# Altium PCB PCB_board.PcbDoc
Units mm, origin at the board's own origin, x right, y up, seen from the top; angles counter-clockwise.
Board outline 62 x 54.25 mm, 2 copper layers (Top Layer, Bottom Layer); 68 components, 71 nets, 381 pads, 0 vias.
Unrouted connection lines stored in the file: 184.
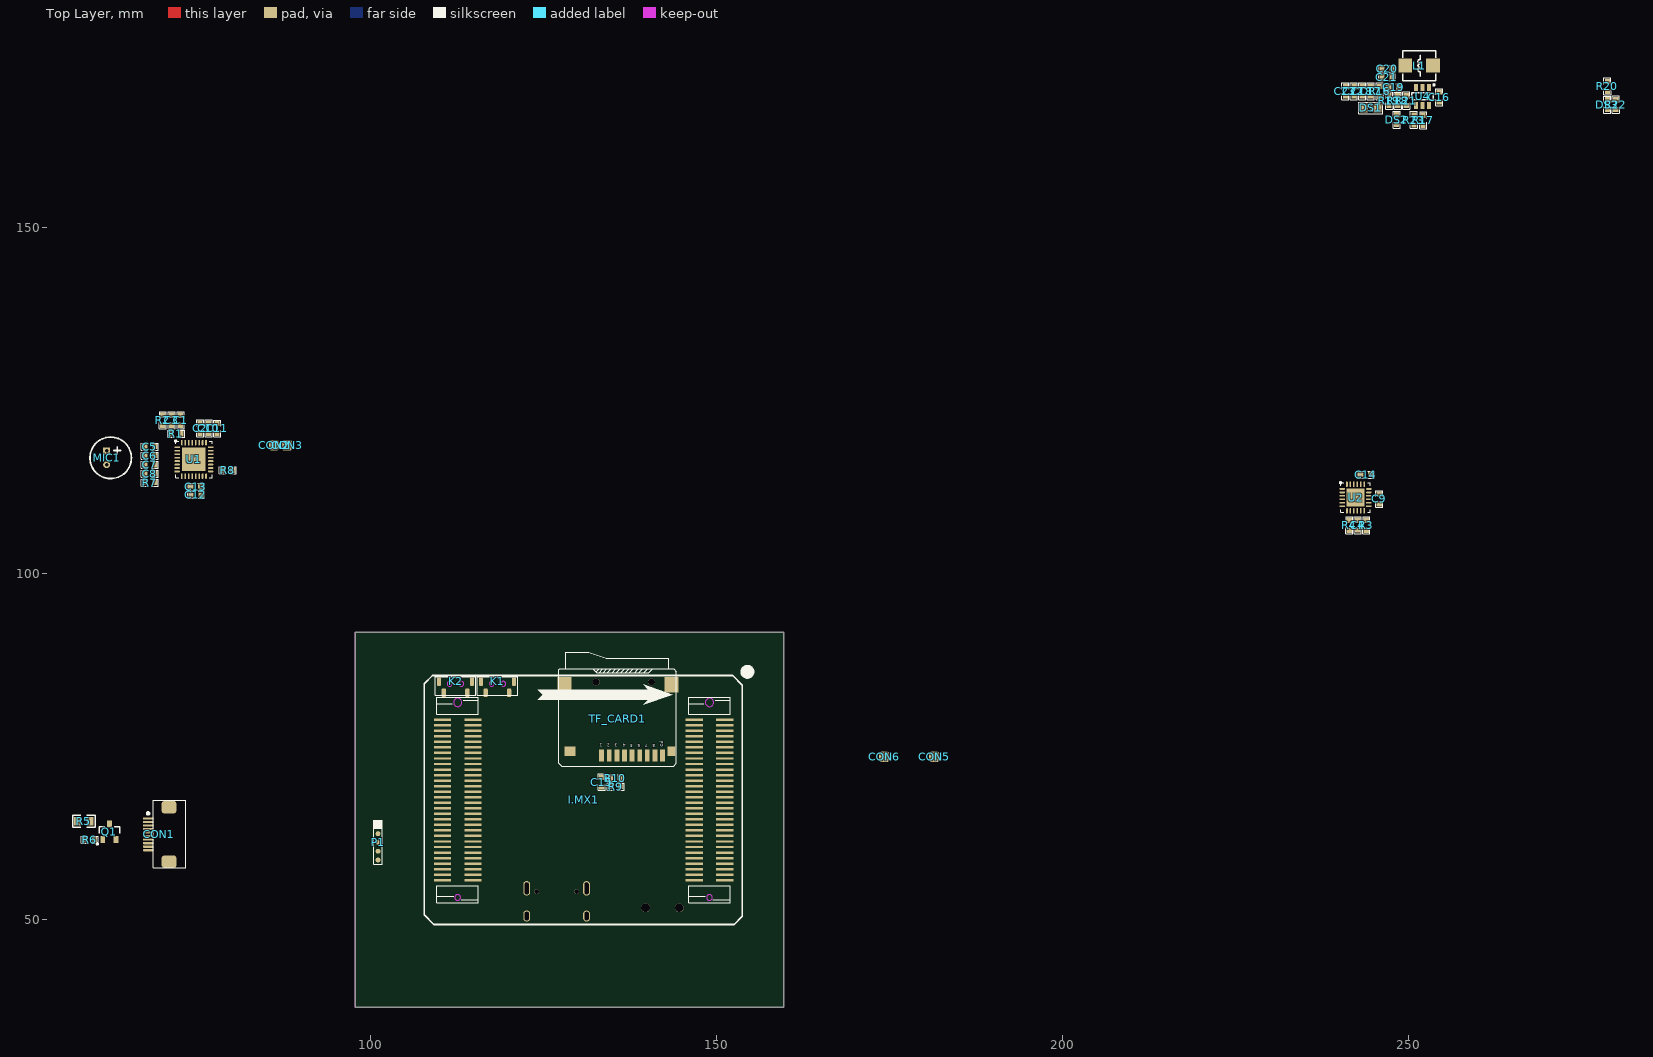
[diagram p0: Top Layer view]
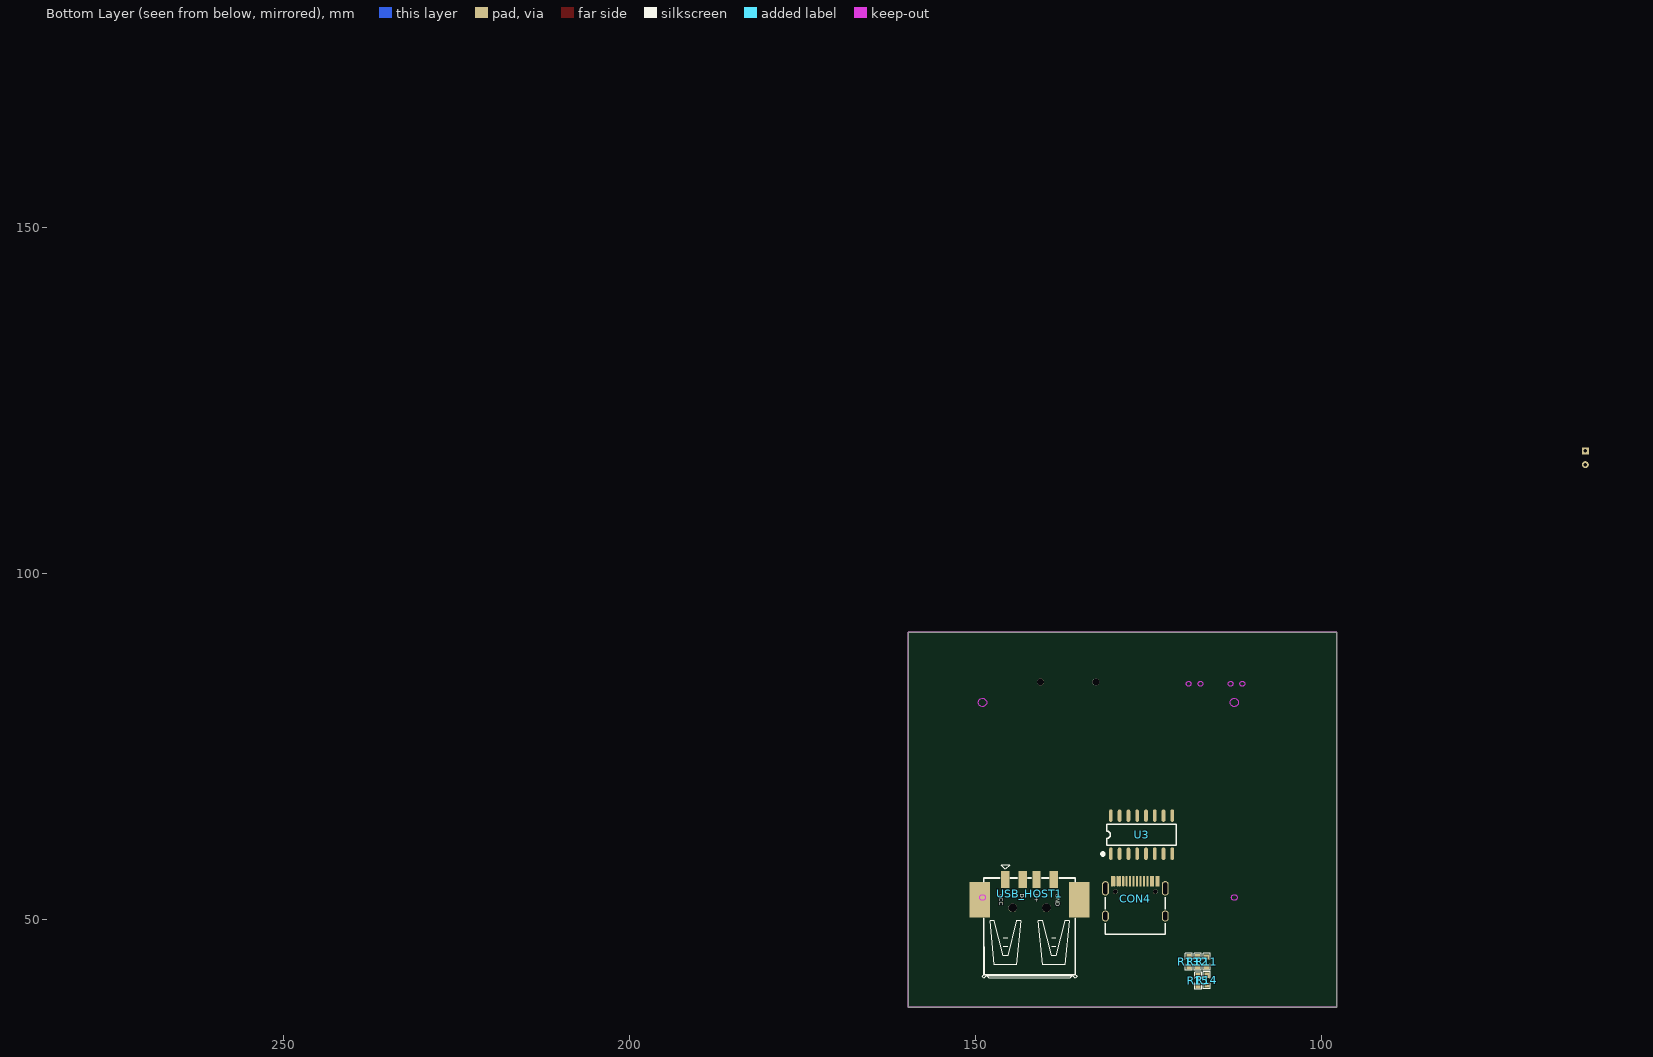
[diagram p1: Bottom Layer view, seen from below]

## Layer stack, top to bottom
Top Solder: solder mask 0.0102, Solder Resist, Dk 3.5
Top Layer: signal copper 0.0356
Dielectric 1: dielectric 0.32, FR-4, Dk 4.8
Bottom Layer: signal copper 0.0356
Bottom Solder: solder mask 0.0102, Solder Resist, Dk 3.5

## Board outline
97.75,37.25 159.75,37.25 159.75,91.5 97.75,91.5

## Design rules (kind name [scope] priority, off if disabled: settings)
Clearance [All] p1: gap=0.254 ignorepadtopadclearanceinfootprint=FALSE except(0: Arc-Hole Track-Hole SMDPad-Hole THPad-Hole Via-Hole Fill-Hole Poly-Hole Region-Hole Text-Hole)
PolygonConnect [All] p1: connectstyle=Relief reliefconductorwidth=0.254 reliefentries=4 polygonreliefangle="90 Angle" airgapwidth=0.254
RoomDefinition boadr [InComponentClass('boadr')] p1: confinementstyle=ConfineIn formatcopy=TRUE lockcomponents=FALSE outline 0,0 50.8,0 50.8,25.4 0,25.4
RoutingVias [All] p1: holewidth=0.711 width=1.27 viastyle="Through Hole" minholewidth=0.711 minwidth=1.27 maxholewidth=0.711 maxwidth=1.27
SolderMaskExpansion [All] p1: expansion=0.102 istentingtop=FALSE
Width [All] p1: maxlimit=0.254 minlimit=0.254 preferedwidth=0.254
30 further rules are at their usual default settings.

## Components (designator, comment, footprint, x,y, rotation, side; value= is the part's Value field where it differs from the comment)
C1 "10uF" "C 0603" 72.528,122.148 r90 top
C2 "10uF" "C 0603" 75.345,121.007 r270 top
C3 "220pF" "C 0603" 71.241,122.148 r90 top
C4 "104" "C 0603" 242.723,106.99 r90 top
C5 "1uF" "C 0603" 68.084,118.341 r180 top
C6 "1uF" "C 0603" 68.084,117.039 r180 top
C7 "1uF" "C 0603" 68.084,115.736 r180 top
C8 "1uF" "C 0603" 68.084,114.434 r180 top
C9 "104" "C 0603" 245.831,110.77 r90 top
C10 "104" "C 0603" 76.578,121.009 r90 top
C11 "10uF" "C 0603" 77.803,120.975 r90 top
C12 "104" "C 0603" 74.756,111.347 r180 top
C13 "10uF" "C 0603" 74.729,112.558 r180 top
C14 "2.2nF" "C 0603" 243.863,114.3 r180 top
C15 "10uF" "C 0603" 133.392,69.836 r270 top
C16 "104" "C 0603" 254.507,168.877 r90 top
C17 "10uF" "C 0603" 244.597,169.734 r90 top
C18 "104" "C 0603" 243.381,169.734 r90 top
C19 "103" "C 0603" 247.906,170.303 r0 top
C20 "10uF" "C 0603" 246.951,172.963 r0 top
C21 "104" "C 0603" 246.948,171.749 r0 top
C22 "10uF" "C 0603" 242.163,169.734 r90 top
C23 "104" "C 0603" 240.942,169.734 r90 top
CON1 "TFT" FPC连接器 69.352,62.269 r90 top
CON2 "connector" PIN-1-TEST 86.043,118.537 r90 top
CON3 "connector" PIN-1-TEST 87.927,118.513 r90 top
CON4 "TYPE-C" type-c 126.901,52.991 r180 bottom
CON5 "connector" PIN-1-TEST 181.5,73.5 r90 top
CON6 "connector" PIN-1-TEST 174.25,73.5 r90 top
DS1 "LED-BLUE" "LED 0805R" 244.565,167.306 r180 top
DS2 "LED-CORE" "LED 0603R" 248.342,165.621 r270 top
DS3 "LED-CORE" "LED 0603R" 278.823,167.791 r270 top
I.MX1 "I.MX6UL_CORE" I.MX6UL_CORE 130.75,67.25 r270 top locked
K1 "TACT 4P" DS-THAM04-ABB-R 118.342,84.052 r0 top value=3.4x3.5
K2 "TACT 4P" DS-THAM04-ABB-R 112.276,84.052 r0 top value=3.4x3.5
L1 "4.7uH" L-SMD-0420 251.592,173.42 r180 top
MIC1 "MIC" MIC-6022 61.835,117.729 r270 top
P1 "UART3" CON-1.27*5 101.075,61.115 r270 top
Q1 "SS8050" SOT23-3N 62.235,62.666 r0 top
R1 "680R" "R 0603" 71.859,120.197 r0 top
R2 "47K" "R 0603" 69.957,122.141 r270 top
R3 "4.7K" "R 0603" 243.945,106.983 r270 top
R4 "10K" "R 0603" 241.507,106.983 r270 top
R5 "1206/50R" 0805 58.532,64.177 r0 top
R6 "10K" "R 0603" 59.378,61.505 r0 top
R7 "0R" "R 0603" 68.085,113.135 r0 top
R8 "10K" "R 0603" 79.356,114.933 r0 top
R9 "47K" "R 0603" 135.446,69.186 r0 top
R10 "47K" "R 0603" 135.36,70.397 r0 top
R11 "10K" "R 0603" 116.596,43.841 r90 bottom
R12 "56k" "R 0603" 117.901,43.871 r90 bottom
R13 "0R" "R 0603" 119.148,43.86 r270 bottom
R14 "100K" "R 0603" 116.553,41.203 r90 bottom
R15 "5.1k" "R 0603" 117.834,41.107 r90 bottom
R16 "4.7K" "R 0603" 245.89,169.702 r90 top
R17 "1K" "R 0603" 252.17,165.52 r270 top
R18 "1k" "R 0603" 248.489,168.359 r90 top
R19 "4.7K" "R 0603" 247.256,168.366 r90 top
R20 "4.7K" "R 0603" 278.824,170.41 r90 top
R21 "19.9k 1%" "R 0603" 249.716,168.366 r90 top
R22 "0R" "R 0603" 280.024,167.788 r90 top
R23 "15k 1%" "R 0603" 250.843,165.556 r90 top
TF_CARD1 "Micro SD" "Micro SD" 143.505,83.908 r180 top
U1 "wm8978" QFN50P500X500X80_HS-33N 74.459,116.496 r0 top
U2 "MPU6050" QFN50P400X400X90_HS-25N 242.406,110.969 r0 top
U3 "CH340C" SOP16_N 126.001,62.235 r90 bottom
U4 "DC JW5060T_6" SOT23-6N 252.092,168.978 r90 top
USB_HOST1 "USB" USB-A/S_C 142.199,51.646 r180 bottom

## Footprints (in the part's own frame and the unit in brackets; to place one, negate y for a bottom-side part, rotate by r counter-clockwise, add the part's x,y. Pads: shape width x height; smd on the part's side, far side on the other; paste and mask are expansions set on the pad)
0805 [mm]
  rect 1x1.27 smd: 1(-0.914,0) 2(0.914,0)
  silkscreen extent -1.6,-0.84 1.63,0.84
"C 0603" [mil]
  rect 30x30 smd: 1(-28.25,0) 2(28.25,0)
  silkscreen extent -48,-20 48,20, body extent -31,-16 32,16, height 32
CON-1.27*5 [mm]
  round 0.7 smd: 1(-2.54,0) 2(-1.27,0) 3(0,0) 4(1.27,0) 5(2.54,0)
  silkscreen extent -3.17,-0.64 3.17,0.64
DS-THAM04-ABB-R [mm] "轻触开关，侧边卧贴"
  rect 1.1x2 on Top Overlay: 0(0,2.032)
  rrect50% 0.6x1.2 smd: 1(-1.7,-1.3) 2(1.7,-1.3) 3(-2.4,0.3) 4(2.4,0.3)
  Keep-Out Layer circle w0.1: c0.85,0 r0.35
  Keep-Out Layer circle w0.1: c-0.85,0 r0.35
  silkscreen extent -2.92,-1.65 2.92,1.02
FPC连接器 [mm] "0.5mm间距，翻盖下接"
  rrect50% 0.3x1.5 smd: 1(2.286,1.506) 2(1.778,1.506) 3(1.27,1.506) 4(0.762,1.506) 5(0.254,1.506) 6(-0.254,1.506) 7(-0.762,1.506) 8(-1.27,1.506) 9(-1.778,1.506) 10(-2.286,1.506)
  rrect50% 1.8x2.2 smd: 11(-3.936,-1.506) 12(3.936,-1.506)
  silkscreen extent -4.83,-3.94 4.95,1.65
I.MX6UL_CORE [mm]
  rect 0.35x2.5 smd: J1_1(-11.6,20.45) J1_2(-10.8,20.45) J1_3(-10,20.45) J1_4(-9.2,20.45) J1_5(-8.4,20.45) J1_6(-7.6,20.45) J1_7(-6.8,20.45) J1_8(-6,20.45) J1_9(-5.2,20.45) J1_10(-4.4,20.45) J1_11(-3.6,20.45) J1_12(-2.8,20.45) J1_13(-2,20.45) J1_14(-1.2,20.45) J1_15(-0.4,20.45) J1_16(0.4,20.45) J1_17(1.2,20.45) J1_18(2,20.45) J1_19(2.8,20.45) J1_20(3.6,20.45) J1_21(4.4,20.45) J1_22(5.2,20.45) J1_23(6,20.45) J1_24(6.8,20.45) J1_25(7.6,20.45) J1_26(8.4,20.45) J1_27(9.2,20.45) J1_28(10,20.45) J1_29(10.8,20.45) J1_30(11.6,20.45) J1_31(11.6,16.05) J1_32(10.8,16.05) J1_33(10,16.05) J1_34(9.2,16.05) J1_35(8.4,16.05) J1_36(7.6,16.05) J1_37(6.8,16.05) J1_38(6,16.05) J1_39(5.2,16.05) J1_40(4.4,16.05) J1_41(3.6,16.05) J1_42(2.8,16.05) J1_43(2,16.05) J1_44(1.2,16.05) J1_45(0.4,16.05) J1_46(-0.4,16.05) J1_47(-1.2,16.05) J1_48(-2,16.05) J1_49(-2.8,16.05) J1_50(-3.6,16.05) J1_51(-4.4,16.05) J1_52(-5.2,16.05) J1_53(-6,16.05) J1_54(-6.8,16.05) J1_55(-7.6,16.05) J1_56(-8.4,16.05) J1_57(-9.2,16.05) J1_58(-10,16.05) J1_59(-10.8,16.05) J1_60(-11.6,16.05) J2_1(-11.6,-15.95) J2_2(-10.8,-15.95) J2_3(-10,-15.95) J2_4(-9.2,-15.95) J2_5(-8.4,-15.95) J2_6(-7.6,-15.95) J2_7(-6.8,-15.95) J2_8(-6,-15.95) J2_9(-5.2,-15.95) J2_10(-4.4,-15.95) J2_11(-3.6,-15.95) J2_12(-2.8,-15.95) J2_13(-2,-15.95) J2_14(-1.2,-15.95) J2_15(-0.4,-15.95) J2_16(0.4,-15.95) J2_17(1.2,-15.95) J2_18(2,-15.95) J2_19(2.8,-15.95) J2_20(3.6,-15.95) J2_21(4.4,-15.95) J2_22(5.2,-15.95) J2_23(6,-15.95) J2_24(6.8,-15.95) J2_25(7.6,-15.95) J2_26(8.4,-15.95) J2_27(9.2,-15.95) J2_28(10,-15.95) J2_29(10.8,-15.95) J2_30(11.6,-15.95) J2_31(11.6,-20.35) J2_32(10.8,-20.35) J2_33(10,-20.35) J2_34(9.2,-20.35) J2_35(8.4,-20.35) J2_36(7.6,-20.35) J2_37(6.8,-20.35) J2_38(6,-20.35) J2_39(5.2,-20.35) J2_40(4.4,-20.35) J2_41(3.6,-20.35) J2_42(2.8,-20.35) J2_43(2,-20.35) J2_44(1.2,-20.35) J2_45(0.4,-20.35) J2_46(-0.4,-20.35) J2_47(-1.2,-20.35) J2_48(-2,-20.35) J2_49(-2.8,-20.35) J2_50(-3.6,-20.35) J2_51(-4.4,-20.35) J2_52(-5.2,-20.35) J2_53(-6,-20.35) J2_54(-6.8,-20.35) J2_55(-7.6,-20.35) J2_56(-8.4,-20.35) J2_57(-9.2,-20.35) J2_58(-10,-20.35) J2_59(-10.8,-20.35) J2_60(-11.6,-20.35)
  Keep-Out Layer circle w0.127: c14.1,-18.15 r0.42
  Keep-Out Layer circle w0.127: c-14.1,-18.15 r0.6
  Keep-Out Layer circle w0.127: c-14.1,18.25 r0.6
  Keep-Out Layer circle w0.127: c14.1,18.25 r0.42
  silkscreen extent -19.04,-23 18,24.23
L-SMD-0420 [mm]
  rect 2x2 smd: 1(-2,0) 2(2,0)
  silkscreen extent -2.39,-2.16 2.36,2.17, body extent -2.26,-2.06 2.24,2.04, height 1.91
"LED 0603R" [mil] "红色0603LED"
  rect 30x30 smd: 1(-27,0) 2(27.5,-0.06)
  silkscreen extent -48,-20 48,20, body extent -31,-16 32,16, height 24
"LED 0805R" [mil]
  rect 45x50 smd: 1(-40,0) 2(36.01,0)
  silkscreen extent -70,-32 66,32, body extent -39,-25 39,25, height 32
MIC-6022 [mm]
  rect 1x1 hole 0.5: 1(0,0)
  round 1 hole 0.5: 2(2,0)
  silkscreen extent -1.99,-2.41 4.01,3.58
"Micro SD" [mm]
  rect 2.032x2.2 smd: 0(0,0) 0(15.5,0)
  rect 1.2x1.4 smd: 0(0,9.6)
  round 1 hole 1 unplated: 0(2.9,-0.4) 0(10.9,-0.4)
  rect 1.6x1.4 smd: 0(14.7,9.6)
  rect 0.7x1.8 smd: 1(10.1,10.227) 2(9,10.227) 3(7.9,10.227) 4(6.8,10.227) 5(5.7,10.227) 6(4.6,10.227) 7(3.5,10.227) 8(2.4,10.227) 9(1.3,10.227)
  silkscreen extent -0.72,-4.68 16.27,11.75, body extent -0.27,-4.63 16,10.57, height 1.8
PIN-1-TEST [mm]
  rrect50% 1.5x1.5 smd: 1(0,0)
QFN50P400X400X90_HS-25N [mm] "QFN, 24-Leads, Body 4.00x4.00mm, Pitch 0.50mm, Thermal Pad 2.60x2.60mm, IPC Medium Density"
  oval 0.8x0.25 smd: 1(-1.925,1.25) 2(-1.925,0.75) 3(-1.925,0.25) 4(-1.925,-0.25) 5(-1.925,-0.75) 6(-1.925,-1.25) 13(1.925,-1.25) 14(1.925,-0.75) 15(1.925,-0.25) 16(1.925,0.25) 17(1.925,0.75) 18(1.925,1.25)
  oval 0.25x0.8 smd: 7(-1.25,-1.925) 8(-0.75,-1.925) 9(-0.25,-1.925) 10(0.25,-1.925) 11(0.75,-1.925) 12(1.25,-1.925) 19(1.25,1.925) 20(0.75,1.925) 21(0.25,1.925) 22(-0.25,1.925) 23(-0.75,1.925) 24(-1.25,1.925)
  rect 2.6x2.6 smd: 25(0,0)
  silkscreen extent -2.28,-2.15 2.15,2.28, body extent -2,-2 2,2, height 0.9
QFN50P500X500X80_HS-33N [mm] "QFN, 32-Leads, Body 5.00x5.00mm, Pitch 0.50mm, Thermal Pad 3.70x3.70mm, IPC Medium Density"
  oval 0.8x0.25 smd: 1(-2.425,1.75) 2(-2.425,1.25) 3(-2.425,0.75) 4(-2.425,0.25) 5(-2.425,-0.25) 6(-2.425,-0.75) 7(-2.425,-1.25) 8(-2.425,-1.75) 17(2.425,-1.75) 18(2.425,-1.25) 19(2.425,-0.75) 20(2.425,-0.25) 21(2.425,0.25) 22(2.425,0.75) 23(2.425,1.25) 24(2.425,1.75)
  oval 0.25x0.8 smd: 9(-1.75,-2.425) 10(-1.25,-2.425) 11(-0.75,-2.425) 12(-0.25,-2.425) 13(0.25,-2.425) 14(0.75,-2.425) 15(1.25,-2.425) 16(1.75,-2.425) 25(1.75,2.425) 26(1.25,2.425) 27(0.75,2.425) 28(0.25,2.425) 29(-0.25,2.425) 30(-0.75,2.425) 31(-1.25,2.425) 32(-1.75,2.425)
  rect 3.4x3.4 smd: 33(0,0)
  silkscreen extent -2.77,-2.65 2.65,2.77, body extent -2.52,-2.52 2.52,2.52, height 0.8
"R 0603" [mil]
  rect 30x30 smd: 1(-28.25,0) 2(28.25,0)
  silkscreen extent -48,-20 49,20, body extent -32,-16 31,16, height 16
SOP16_N [mm]
  oval 1.8x0.55 smd: 1(-2.75,4.445) 2(-2.75,3.175) 3(-2.75,1.905) 4(-2.75,0.635) 5(-2.75,-0.635) 6(-2.75,-1.905) 7(-2.75,-3.175) 8(-2.75,-4.445) 9(2.75,-4.445) 10(2.75,-3.175) 11(2.75,-1.905) 12(2.75,-0.635) 13(2.75,0.635) 14(2.75,1.905) 15(2.75,3.175) 16(2.75,4.445)
  silkscreen extent -2.95,-5 1.52,5.74, body extent -3,-5 3,5, height 1.9
SOT23-3N [mm]
  rect 0.7x1 smd: 1(-0.95,-1.1) 2(0.95,-1.1) 3(0,1.1)
  silkscreen extent -1.88,-1.88 1.5,0.7, body extent -1.5,-1.2 1.5,1.2, height 1.05
SOT23-6N [mm]
  rect 1x0.55 smd: 1(1.3,-0.95) 2(1.3,0) 3(1.3,0.95) 4(-1.3,0.95) 5(-1.3,0) 6(-1.3,-0.95)
  silkscreen extent -0.51,-1.78 1.78,1.55, body extent -1.4,-1.5 1.4,1.5, height 1.15
type-c [mm]
  round 0.65 hole 0.65: 0(-2.89,0.98) 0(2.89,0.98)
  oval 1x1.6 hole 0.6 slot 1.2 at 90 deg: 1(4.325,-2.52) 2(-4.325,-2.52)
  oval 1x2.1 hole 0.6 slot 1.7 at 90 deg: 3(-4.325,1.48) 4(4.325,1.48)
  rrect50% 0.3x1.5 smd: A1(-3.35,2.52) A4(-2.55,2.52) A5(-1.25,2.52) A6(-0.25,2.52) A7(0.25,2.52) A8(1.25,2.52) A9(2.55,2.52) A12(3.35,2.52) B1(3.05,2.52) B4(2.25,2.52) B5(1.75,2.52) B6(0.75,2.52) B7(-0.75,2.52) B8(-1.75,2.52) B9(-2.25,2.52) B12(-3.05,2.52)
  silkscreen extent -4.33,-5.12 4.33,0.22, body extent -4.48,-5.26 4.46,2.64, height 3.28
USB-A/S_C [mm] "A型贴片母头，"
  rect 1.2x2.5 smd: 1(-3.5,4.1) 2(-1,4.1) 3(1,4.1) 4(3.5,4.1)
  rect 3x5.15 smd: 5(-7.2,1.2) 5(7.2,1.2)
  round 1.25 hole 1.25 unplated: 7(-2.45,0) 8(2.45,0)
  silkscreen extent -6.85,-10.17 6.86,6.19, body extent -7.75,-9.9 7.75,4.8, height 7.4

## Part data
C1 C2 C3 C4 C5 C6 C7 C8 C9 C10 C11 C12 C13 C14 C15 C16 C17 C18 C19 C20 C21 C22 C23: library part C
CON1: library part TFT_SPI_10PIN
CON2 CON3 CON5 CON6: library part PIN-1
DS1 DS2 DS3: library part LED-SMD, "贴片LED", BOM名称=贴片LED, 学习资源=www.ooocke.com, 版权归属=源创客
I.MX1: library part I.MX6UL核心板, "I.MX6UL核心板"
K1 K2: library part ButtonTACT, "Button", type="TACT 4P"
L1: library part L-CDRH, "功率屏蔽电感", BOM名称=功率屏蔽电感, 学习资源=www.ooocke.com, 版权归属=源创客
P1: library part "Header 5", "Header, 5-Pin", LatestRevisionDate=17-Jul-2002, LatestRevisionNote="Re-released for DXP Platform.", Publisher="Altium Limited"
Q1: library part 8050-SMD, "高频放大-NPN型", BOM名称=高频放大-NPN型, 学习资源=www.ooocke.com, 属性="40V 1.5A 1W 100MHZ", 版权归属=源创客
R1 R2 R3 R4 R5 R6 R7 R8 R9 R10 R11 R12 R13 R14 R15 R16 R17 R18 R19 R20 R21 R22 R23: library part R
TF_CARD1: "Micro SD卡", BOM名称="Micro SD卡", 学习资源=www.ooocke.com, 版权归属=源创客
U1: "音频"
U3: library part CH340G, "USB2UART"
U4: "DC降压芯片"
USB_HOST1: library part USB-A/S, "USB-A型母接口", BOM名称=USB-A型母接口, 学习资源=www.ooocke.com, 版权归属=源创客

## Nets (pads, with @x,y where several pads share a name; then routed paths per layer and width w, separated by ;. In a path a pad name is that pad's centre, name@x,y a point inside that pad or via, vN(x,y) a via of type N, cw(c..) or ccw(c..) an arc to the next point about the centre after c; other vN are vias at no path point)
CC1: CON4.A5 R13.1
CH_D+: CON4.B6 U3.5
CH_D-: CON4.B7 U3.6
DCDC-3V3: C9.1 C12.1 C13.1 C15.2 C19.1 C20.2 C21.2 CON1.8 CON1.9 CON6.1 L1.2 R9.2 R10.2 R19.2 R21.2 TF_CARD1.4 U1.13 U1.14 U1.31 U2.8 U2.13 U3.4 U3.16
ECSPI3_MISO: CON1.7 I.MX1.J2_40
ECSPI3_MOSI: CON1.6 I.MX1.J2_39
ECSPI3_SCLK: CON1.3 I.MX1.J2_41
ECSPI3_SS0: CON1.5 I.MX1.J2_42
GND: C1.2 C2.1 C3.2 C4.1 C9.2 C10.2 C11.2 C12.2 C13.2 C14.1 C15.1 C17.1 C18.1 C20.1 C21.1 C22.1 C23.1 CON1.1 CON1.11 CON1.12 CON4.1 CON4.2 CON4.3 CON4.4 CON4.A1 CON4.A12 CON4.B1 CON4.B12 DS1.2 DS2.2 DS3.2 I.MX1.J2_59 I.MX1.J2_60 K1.1 K1.3 K2.1 K2.3 P1.1 Q1.2 R2.1 R3.2 R4.2 R7.2 R8.2 R14.1 R15.1 R17.1 R22.1 R23.1 TF_CARD1.6 U1.12 U1.24 U1.28 U1.33 U2.1 U2.11 U2.18 U2.25 U3.1 U4.1 U4.5 USB_HOST1.4 USB_HOST1.5
I2C1_SCL: I.MX1.J2_33 U2.23
I2C1_SDA: I.MX1.J2_34 U2.24
I2C2_SCL: I.MX1.J2_31 U1.16
I2C2_SDA: I.MX1.J2_32 U1.17
KEY_1: I.MX1.J2_49 K2.2 K2.4
KEY_2: I.MX1.J2_48 K1.2 K1.4
LED_STATUE: I.MX1.J2_45 R20.2
NetC1_1: C1.1 R1.2 U1.32
NetC2_2: C2.2 U1.27
NetC3_1: C3.1 C5.2 C6.2 MIC1.1 R1.1 R2.2
NetC4_2: C4.2 U2.10
NetC5_1: C5.1 U1.1
NetC6_1: C6.1 U1.4
NetC7_1: C7.1 U1.2
NetC7_2: C7.2 C8.2 MIC1.2 R7.1
NetC8_1: C8.1 U1.5
NetC14_2: C14.2 U2.20
NetC16_1: C16.1 U4.6
NetC16_2: C16.2 L1.1 U4.2
NetC19_2: C19.2 R18.2
NetCON1_10: CON1.10 R5.1
NetCON2_1: CON2.1 U1.25
NetCON3_1: CON3.1 U1.23
NetDS1_1: DS1.1 R16.1
NetDS2_1: DS2.1 R19.1
NetDS3_1: DS3.1 R20.1
NetQ1_1: Q1.1 R6.2
NetQ1_3: Q1.3 R5.2
NetR3_1: R3.1 U2.12
NetR4_1: R4.1 U2.9
NetR8_1: R8.1 U1.18
NetR12_1: R12.1 R13.2 R15.2
NetR18_1: R18.1 R21.1 R23.2 U4.4
PMIC_ON_REQ: I.MX1.J1_41 R17.2
RESET: I.MX1.J1_40 R22.2
SAI_LRCK: I.MX1.J2_18 U1.7
SAI_MCLK: I.MX1.J2_20 U1.11
SAI_SCLK: I.MX1.J2_17 U1.8
SAI_SDIN: I.MX1.J2_21 U1.10
SAI_SDOUT: I.MX1.J2_19 U1.9
SD1_CLK: I.MX1.J1_54 TF_CARD1.5
SD1_CMD: I.MX1.J1_53 R10.1 TF_CARD1.3
SD1_DATA0: I.MX1.J1_49 TF_CARD1.7
SD1_DATA1: I.MX1.J1_50 TF_CARD1.8
SD1_DATA2: I.MX1.J1_52 TF_CARD1.1
SD1_DATA3: I.MX1.J1_51 TF_CARD1.2
SD1_DETECET: I.MX1.J1_48 R9.1 TF_CARD1.9
TTF_DC: CON1.4 I.MX1.J2_44
TTF_PWM_BK: I.MX1.J2_16 R6.1
TTF_RST: CON1.2 I.MX1.J2_43
TTL_RX: I.MX1.J2_46 U3.3
TTL_TX: I.MX1.J2_50 U3.2
UART3_CTS: I.MX1.J2_36 P1.4
UART3_RTS: I.MX1.J2_35 P1.5
UART3_RXD: I.MX1.J2_37 P1.3
UART3_TXD: I.MX1.J2_38 P1.2
USB_OTG1_D+: CON4.A6 I.MX1.J2_54
USB_OTG1_D-: CON4.A7 I.MX1.J2_53
USB_OTG1_ID: I.MX1.J2_51 R11.1 R14.2
USB_OTG1_VBUS: C10.1 C11.1 C17.2 C18.2 C22.2 C23.2 CON4.A4 CON4.A9 CON4.B4 CON4.B9 CON5.1 I.MX1.J2_1 I.MX1.J2_2 I.MX1.J2_57 I.MX1.J2_58 R11.2 R12.2 R16.2 U1.26 USB_HOST1.1
USB_OTG2_D+: I.MX1.J2_56 USB_HOST1.3
USB_OTG2_D-: I.MX1.J2_55 USB_HOST1.2
pads on no net: CON4.0 CON4.A8 CON4.B5 CON4.B8 I.MX1.J1_1 I.MX1.J1_2 I.MX1.J1_3 I.MX1.J1_4 I.MX1.J1_5 I.MX1.J1_6 I.MX1.J1_7 I.MX1.J1_8 I.MX1.J1_9 I.MX1.J1_10 I.MX1.J1_11 I.MX1.J1_12 I.MX1.J1_13 I.MX1.J1_14 I.MX1.J1_15 I.MX1.J1_16 I.MX1.J1_17 I.MX1.J1_18 I.MX1.J1_19 I.MX1.J1_20 I.MX1.J1_21 I.MX1.J1_22 I.MX1.J1_23 I.MX1.J1_24 I.MX1.J1_25 I.MX1.J1_26 I.MX1.J1_27 I.MX1.J1_28 I.MX1.J1_29 I.MX1.J1_30 I.MX1.J1_31 I.MX1.J1_32 I.MX1.J1_33 I.MX1.J1_34 I.MX1.J1_35 I.MX1.J1_36 I.MX1.J1_37 I.MX1.J1_38 I.MX1.J1_39 I.MX1.J1_42 I.MX1.J1_43 I.MX1.J1_44 I.MX1.J1_45 I.MX1.J1_46 I.MX1.J1_47 I.MX1.J1_55 I.MX1.J1_56 I.MX1.J1_57 I.MX1.J1_58 I.MX1.J1_59 I.MX1.J1_60 I.MX1.J2_3 I.MX1.J2_4 I.MX1.J2_5 I.MX1.J2_6 I.MX1.J2_7 I.MX1.J2_8 I.MX1.J2_9 I.MX1.J2_10 I.MX1.J2_11 I.MX1.J2_12 I.MX1.J2_13 I.MX1.J2_14 I.MX1.J2_15 I.MX1.J2_22 I.MX1.J2_23 I.MX1.J2_24 I.MX1.J2_25 I.MX1.J2_26 I.MX1.J2_27 I.MX1.J2_28 I.MX1.J2_29 I.MX1.J2_30 I.MX1.J2_47 I.MX1.J2_52 K1.0 K2.0 TF_CARD1.0 U1.3 U1.6 U1.15 U1.19 U1.20 U1.21 U1.22 U1.29 U1.30 U2.2 U2.3 U2.4 U2.5 U2.6 U2.7 U2.14 U2.15 U2.16 U2.17 U2.19 U2.21 U2.22 U3.7 U3.8 U3.9 U3.10 U3.11 U3.12 U3.13 U3.14 U3.15 U4.3 USB_HOST1.7 USB_HOST1.8

## Keep-outs
Keep-Out Layer:
  the board outline again, w0.1

## Text inside footprints (layer, text, board x,y; h text height)
TF_CARD1: Top Overlay "Cd" at 142.524,74.976 h0.76 r90; Top Overlay "8" at 141.177,75.535 h0.76 r180; Top Overlay "7" at 140.06,75.56 h0.76 r180; Top Overlay "6" at 138.993,75.56 h0.76 r180; Top Overlay "5" at 137.926,75.56 h0.76 r180; Top Overlay "4" at 136.859,75.586 h0.76 r180; Top Overlay "3" at 135.666,75.586 h0.76 r180; Top Overlay "2" at 134.599,75.586 h0.76 r180; Top Overlay "1" at 133.507,75.611 h0.76 r180
USB_HOST1: Bottom Overlay "GND" at 138.643,53.678 h1.02 r90; Bottom Overlay "D+" at 141.691,53.678 h1.02 r90; Bottom Overlay "D-" at 143.723,53.678 h1.02 r90; Bottom Overlay "VCC" at 146.771,53.678 h1.02 r90